# Altium PCB 啊度no.PcbDoc
Units mm, origin at the board's own origin, x right, y up, seen from the top; angles counter-clockwise.
Board outline 51.18 x 74.68 mm, 2 copper layers (Top Layer, Bottom Layer); 10 components, 14 nets, 65 pads, 0 vias.
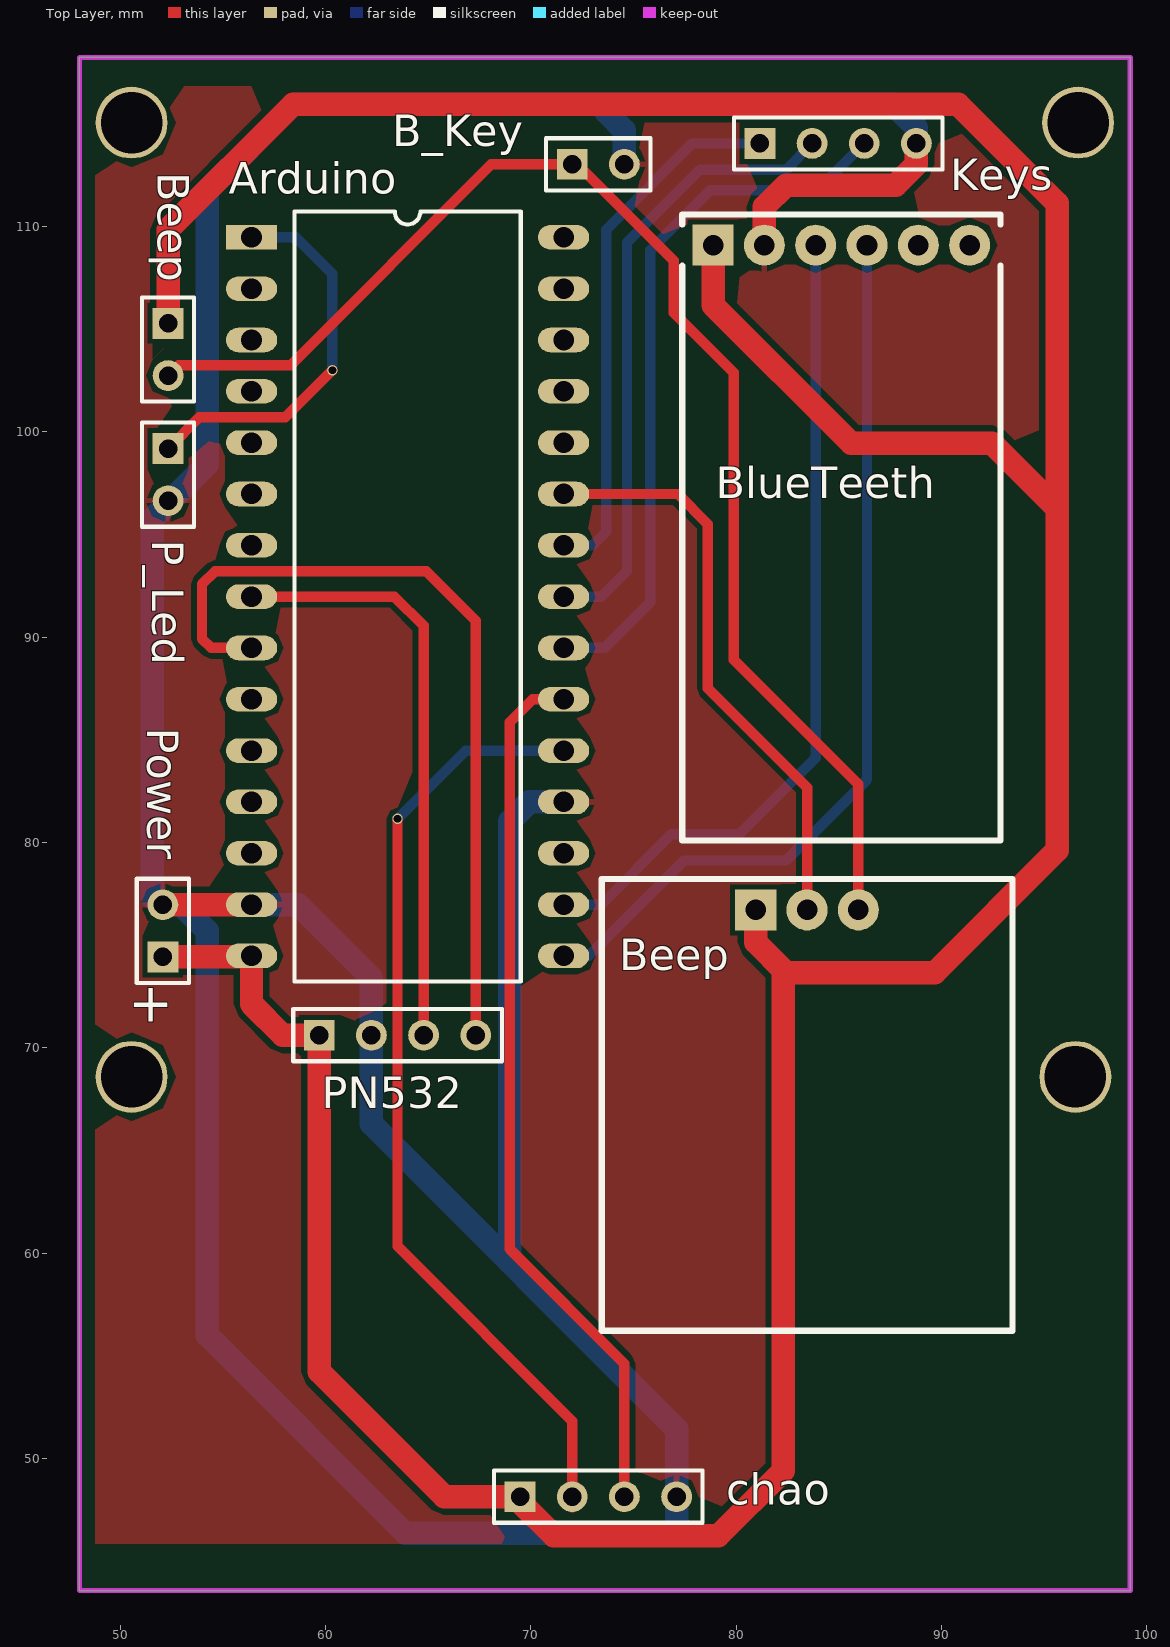
[diagram p0: Top Layer view]
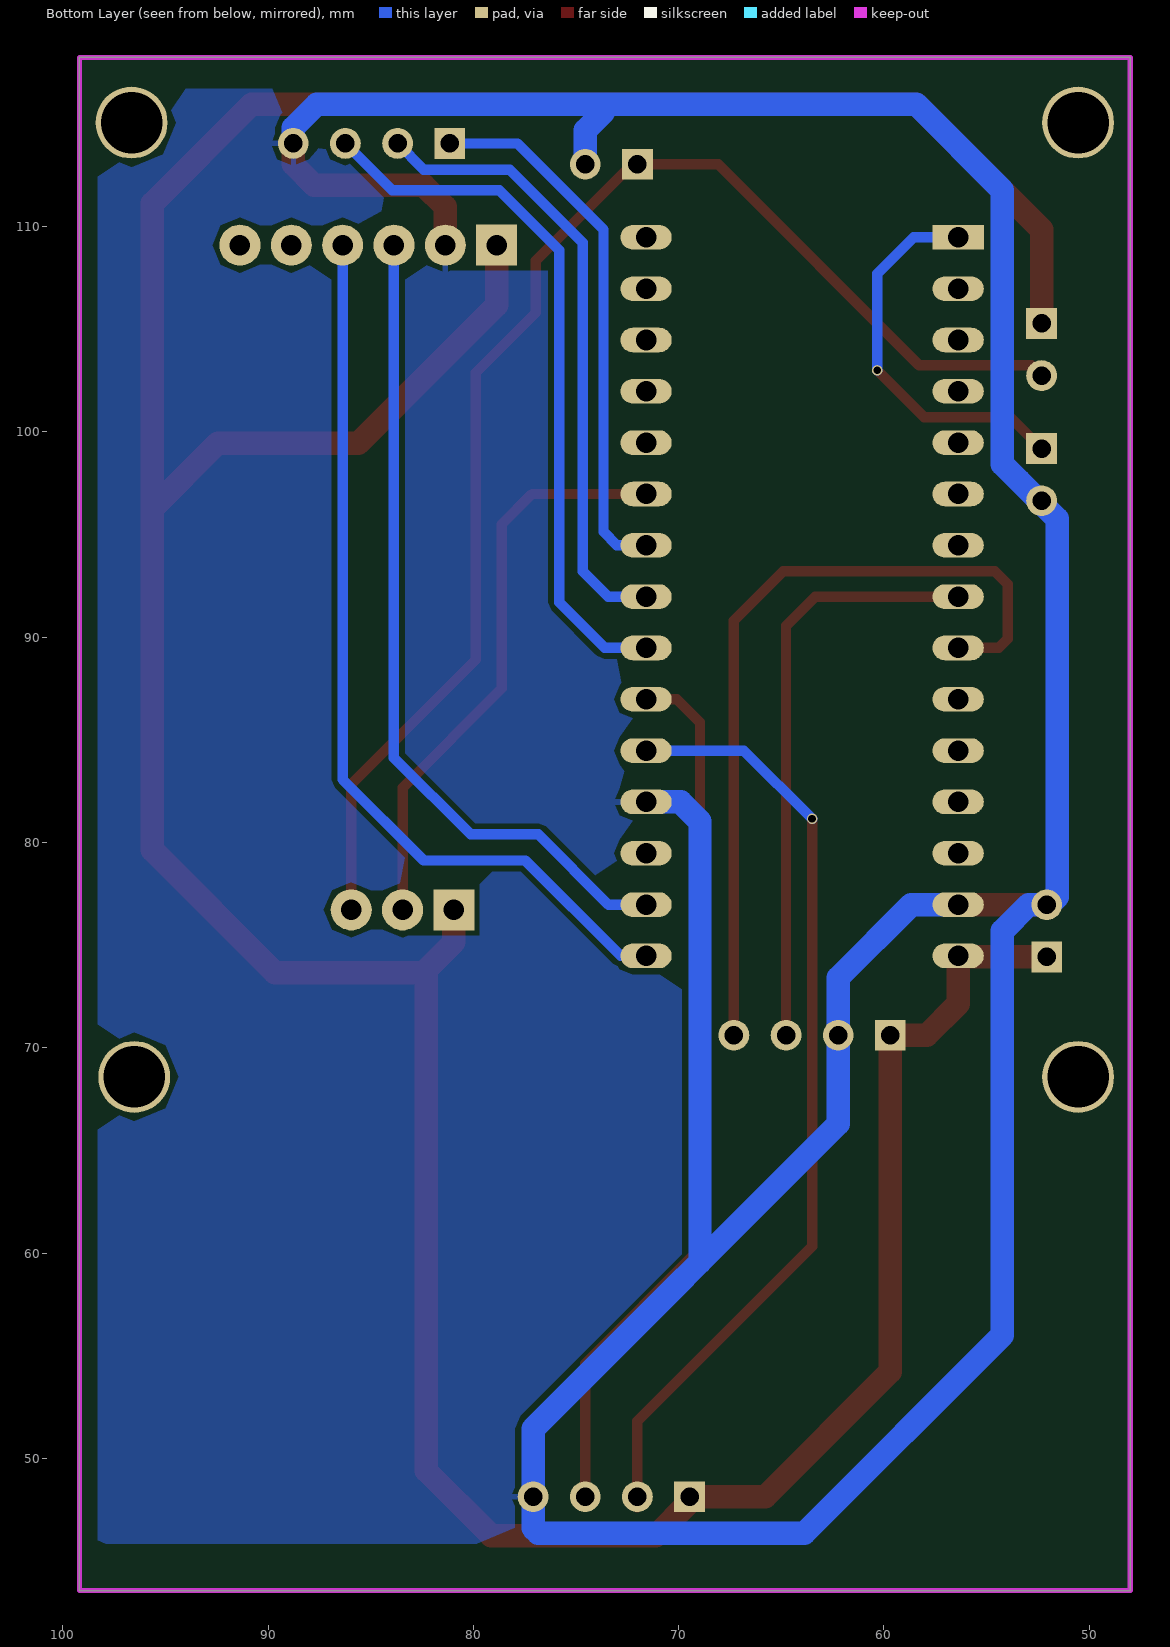
[diagram p1: Bottom Layer view, seen from below]

## Layer stack, top to bottom
Top Layer: signal copper 0.0356
Dielectric: dielectric 0.32, FR-4, Dk 4.8
Bottom Layer: signal copper 0.0356

## Board outline
48.006,118.237 99.187,118.237 99.187,43.561 48.006,43.561

## Design rules (kind name [scope] priority, off if disabled: settings)
Clearance [All] p1: gap=0.254
PolygonConnect [All] p1: connectstyle=Relief reliefconductorwidth=0.254 reliefentries=4 polygonreliefangle="90 Angle"
RoutingVias [All] p1: holewidth=0.711 width=1.27 viastyle="Through Hole" minholewidth=0.711 minwidth=1.27 maxholewidth=0.711 maxwidth=1.27
SilkToSilkClearance [All] p1: silktosilkclearance=0
SilkscreenOverComponentPads [All] p1: minsilkscreentomaskgap=0
SolderMaskExpansion [All] p1: expansion=0.102
Width [All] p1: maxlimit=2.54 minlimit=0.203 preferedwidth=0.254
26 further rules are at their usual default settings.

## Classes and differential pairs
component class 啊度no: Arduino B_Key Beep chao Keys P_Led PN532 Power

## Components (designator, comment, footprint, x,y, rotation, side; value= is the part's Value field where it differs from the comment)
Arduino "啊度no" 啊度no 56.388,109.474 r0 top (schematic designator U1)
B_Key "蜂鸣器插针" HDR1X2 72.009,113.03 r0 top (schematic designator P7)
Beep "蜂鸣器模块" 蜂鸣器模块 83.947,69.215 r0 top (schematic designator U3)
Beep "LED_RED" HDR1X2 52.324,105.283 r270 top (schematic designator P4)
BlueTeeth "蓝牙模块" 蓝牙模块 78.867,109.093 r0 top (schematic designator U2)
chao "超声波模块" HDR1X4 69.469,48.133 r0 top (schematic designator P3)
Keys "按钮" HDR1X4 81.153,114.046 r0 top (schematic designator P1)
P_Led "LED_GREEN" HDR1X2 52.324,99.187 r270 top (schematic designator P5)
PN532 "PN532" HDR1X4 59.69,70.612 r0 top (schematic designator P2)
Power "电源暂时" HDR1X2 52.07,74.422 r90 top (schematic designator P6)

## Footprints (in the part's own frame and the unit in brackets; to place one, negate y for a bottom-side part, rotate by r counter-clockwise, add the part's x,y. Pads: shape width x height; smd on the part's side, far side on the other; paste and mask are expansions set on the pad)
HDR1X2 [mm] "Connector; Header; 2 Posit"
  rect 1.5x1.5 hole 0.9: 1(0,0)
  round 1.5 hole 0.9: 2(2.54,0)
  silkscreen extent -1.27,-1.27 3.81,1.27
HDR1X4 [mm] "Connector; Header; 4 Posit"
  rect 1.5x1.5 hole 0.9: 1(0,0)
  round 1.5 hole 0.9: 2(2.54,0) 3(5.08,0) 4(7.62,0)
  silkscreen extent -1.27,-1.27 8.89,1.27
啊度no [mm]
  oval 2.5x1.2 hole 1: 3V3(0,-2.5) 5V(0,-27.5) A0(0,-7.5) A1(0,-10) A2(0,-12.5) A3(0,-15) A4(0,-17.5) A5(0,-20) A6(0,-22.5) A7(0,-25) D2(15.2,-25) D3(15.2,-22.5) D4(15.2,-20) D5(15.2,-17.5) D6(15.2,-15) D7(15.2,-12.5) D8(15.2,-10) D9(15.2,-7.5) D10(15.2,-5) D11(15.2,-2.5) D12(15.2,0) GND(0,-32.5) GND(15.2,-27.5) REF(0,-5) RST(0,-30) RST(15.2,-30) RXD(15.2,-32.5) TX1(15.2,-35) VIN(0,-35)
  rect 2.5x1.2 hole 1: D13(0,0)
  silkscreen extent 2.08,-36.25 13.12,1.25
蓝牙模块 [mm]
  round 2 hole 1: GND(2.5,0) KEY(10,0) LED(12.5,0) RXD(7.5,0) TXD(5,0)
  rect 2x2 hole 1: VCC(0,0)
  silkscreen extent -1.5,-29 14,1.5
蜂鸣器模块 [mm]
  round 2 hole 1: GND(2,7.5) IO(-0.5,7.5)
  rect 2x2 hole 1: VCC(-3,7.5)
  silkscreen extent -10.5,-13 9.5,9

## Part data
B_Key Beep P_Led Power: library part "Header 2", "Header, 2-Pin"
chao Keys PN532: library part "Header 4", "Header, 4-Pin"

## Free pads (board coordinates)
  round 3.5 hole 3: 0(96.647,115.062) 1(96.52,68.58) 2(50.546,68.58) 3(50.546,115.062)
  round 0.508 hole 0.381: 4(60.325,102.997) 4(63.5,81.153)

## Nets (pads, with @x,y where several pads share a name; then routed paths per layer and width w, separated by ;. In a path a pad name is that pad's centre, name@x,y a point inside that pad or via, vN(x,y) a via of type N, cw(c..) or ccw(c..) an arc to the next point about the centre after c; other vN are vias at no path point)
ECHO: Arduino.D3 chao.3 | length 43.4
  Top Layer w0.508: Arduino.D3 70.083,86.974 68.961,85.852 68.961,60.198 74.549,54.61 chao.3@74.549,47.879
FENG: Arduino.D7 Beep.IO | length 28.4
  Top Layer w0.508: Arduino.D7 77.143,96.974 78.613,95.504 78.613,87.503 83.447,82.669 Beep.IO
GND: Arduino.GND B_Key.2 BlueTeeth.GND chao.4 Keys.4 P_Led.2 PN532.2 Power.2 | length 206.2
  Top Layer w1.143: Power.2 Arduino.GND@56.388,76.962 ; BlueTeeth.GND 81.367,110.958 82.423,112.014 87.757,112.014 88.773,113.03 Keys.4
  Bottom Layer w1.143: 53.415,97.611 51.562,95.758 51.562,77.343 51.943,76.962 52.959,76.962 54.229,75.692 54.229,56.007 63.881,46.355 76.835,46.355 77.089,46.609 77.089,51.435 62.23,66.294 PN532.2 62.23,73.406 58.662,76.974 Arduino.GND@56.388,76.974 ; 53.416,97.611 54.229,98.425 54.229,111.76 58.42,115.951 87.63,115.951 88.773,114.808 Keys.4 ; 68.961,59.563 68.961,81.026 69.909,81.974 Arduino.GND@71.588,81.974 ; 73.66,115.57 74.549,114.681 B_Key.2
KEY01: Arduino.D6 Keys.1 | length 26.3
  Bottom Layer w0.508: Arduino.D6 73.011,94.474 73.66,95.123 73.66,109.855 77.851,114.046 Keys.1
KEY02: Arduino.D5 Keys.2 | length 30.6
  Bottom Layer w0.508: Arduino.D5 73.432,91.974 74.676,93.218 74.676,109.22 78.232,112.776 82.423,112.776 Keys.2
KEY03: Arduino.D4 Keys.3 | length 34.9
  Bottom Layer w0.508: Arduino.D4 73.599,89.474 75.819,91.694 75.819,108.839 78.74,111.76 83.947,111.76 Keys.3
LED01: B_Key.1 Beep.2 Beep.GND | length 66.2
  Top Layer w0.508: Beep.2 52.832,103.251 58.293,103.251 68.072,113.03 72.263,113.03 76.962,108.331 76.962,105.791 79.883,102.87 79.883,88.9 85.947,82.836 Beep.GND
LED02: Arduino.D13 P_Led.1 pad.4@60.325,102.997 | length 19
  Top Layer w0.508: P_Led.1 53.848,100.711 55.626,100.711 58.039,100.711 pad.4@60.325,102.997
  Bottom Layer w0.508: Arduino.D13 58.547,109.474 60.325,107.696 pad.4@60.325,102.997
MRST: Arduino.RXD BlueTeeth.TXD | length 40.2
  Bottom Layer w0.508: Arduino.RXD 73.418,76.974 76.835,80.391 80.137,80.391 83.867,84.121 BlueTeeth.TXD
MTSR: Arduino.TX1 BlueTeeth.RXD | length 44.4
  Bottom Layer w0.508: Arduino.TX1 72.823,74.474 77.47,79.121 82.423,79.121 86.367,83.065 BlueTeeth.RXD
SCL: Arduino.A5 PN532.4 | length 40.1
  Top Layer w0.508: Arduino.A5 54.417,89.474 53.975,89.916 53.975,92.583 54.61,93.218 64.897,93.218 67.31,90.805 PN532.4
SDA: Arduino.A4 PN532.3 | length 28.9
  Top Layer w0.508: Arduino.A4 63.347,91.974 64.77,90.551 PN532.3
TRIG: Arduino.D2 chao.2 pad.4@63.5,81.153 | length 46.5
  Top Layer w0.508: pad.4@63.5,81.153 63.5,60.325 72.009,51.816 chao.2@72.009,47.625
  Bottom Layer w0.508: pad.4@63.5,81.153 66.821,84.474 Arduino.D2
VCC: Arduino.VIN Beep.1 Beep.VCC BlueTeeth.VCC chao.1 PN532.1 Power.1 | length 207.8
  Top Layer w1.143: Power.1 56.388,74.422 56.388,72.136 57.912,70.612 PN532.1 59.69,54.229 65.786,48.133 chao.1 69.469,47.879 71.12,46.228 79.121,46.228 82.296,49.403 82.296,73.533 82.423,73.66 ; Beep.1 52.324,109.855 58.42,115.951 90.805,115.951 95.631,111.125 95.631,79.629 89.662,73.66 82.423,73.66 ; BlueTeeth.VCC 78.867,106.172 85.598,99.441 92.456,99.441 95.631,96.266 ; Beep.VCC 80.947,75.136 82.423,73.66 ; 84.582,73.66 82.423,73.66
pads on no net: Arduino.3V3 Arduino.5V Arduino.A0 Arduino.A1 Arduino.A2 Arduino.A3 Arduino.A6 Arduino.A7 Arduino.D8 Arduino.D9 Arduino.D10 Arduino.D11 Arduino.D12 Arduino.REF Arduino.RST BlueTeeth.KEY BlueTeeth.LED

## Polygon pours and split planes (outlines as drawn)
GND on Top Layer "Bottom Layer-No Net" (solid, remove dead copper, pour order 4): 48.768,116.84 98.552,116.84 98.552,45.847 48.768,45.847
GND on Bottom Layer "Bottom Layer-No Net" (solid, remove dead copper, pour order 10): 48.768,116.713 98.298,116.713 98.298,45.466 97.917,45.847 48.768,45.847

## Keep-outs
Keep-Out Layer:
  the board outline again, w0.254

## Silkscreen, mask and mechanical layers (free items; w line width, h text height)
Top Overlay:
  text "+" at 52.578,72.898 h1.91 r180